# Altium PCB PCB2(binary).PcbDoc (part 1 of 2)
Units mm, origin at the board's own origin, x right, y up, seen from the top; angles counter-clockwise.
Board outline 121.9 x 82.3 mm, 2 copper layers (Top Layer, Bottom Layer); 260 components, 214 nets, 701 pads, 54 vias.
Unrouted connection lines stored in the file: 53.
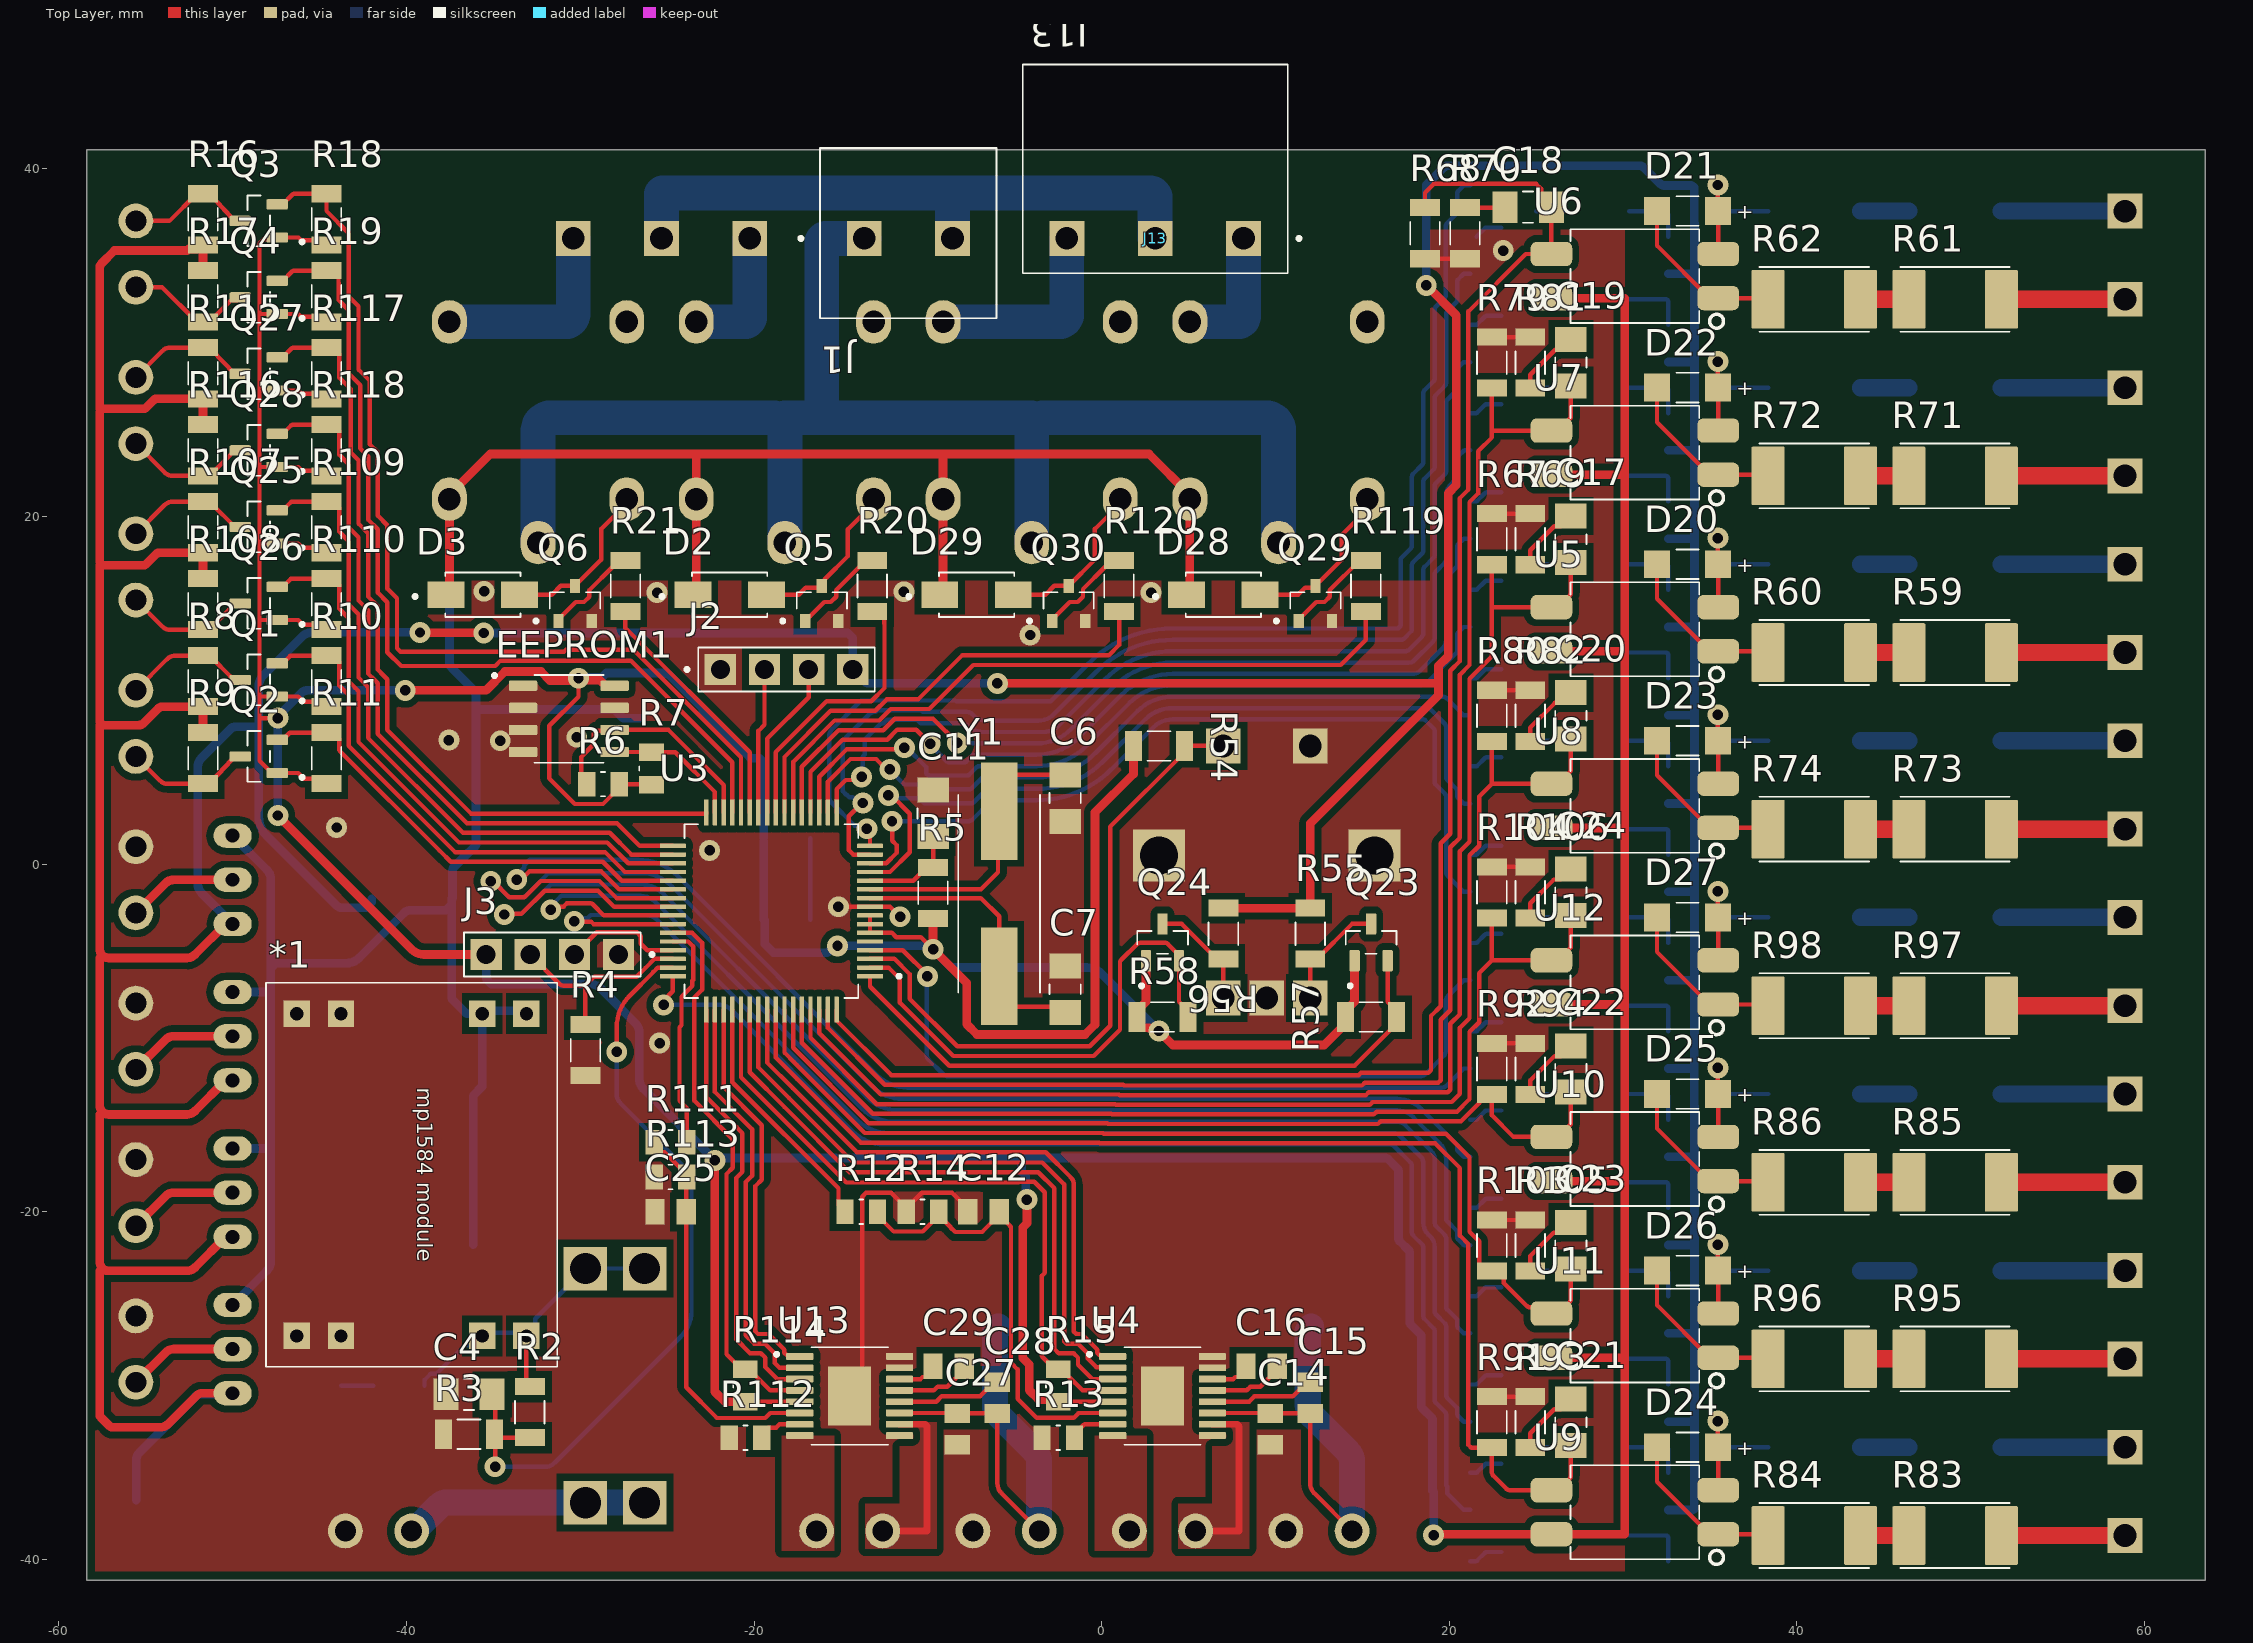
[diagram p0: Top Layer view]
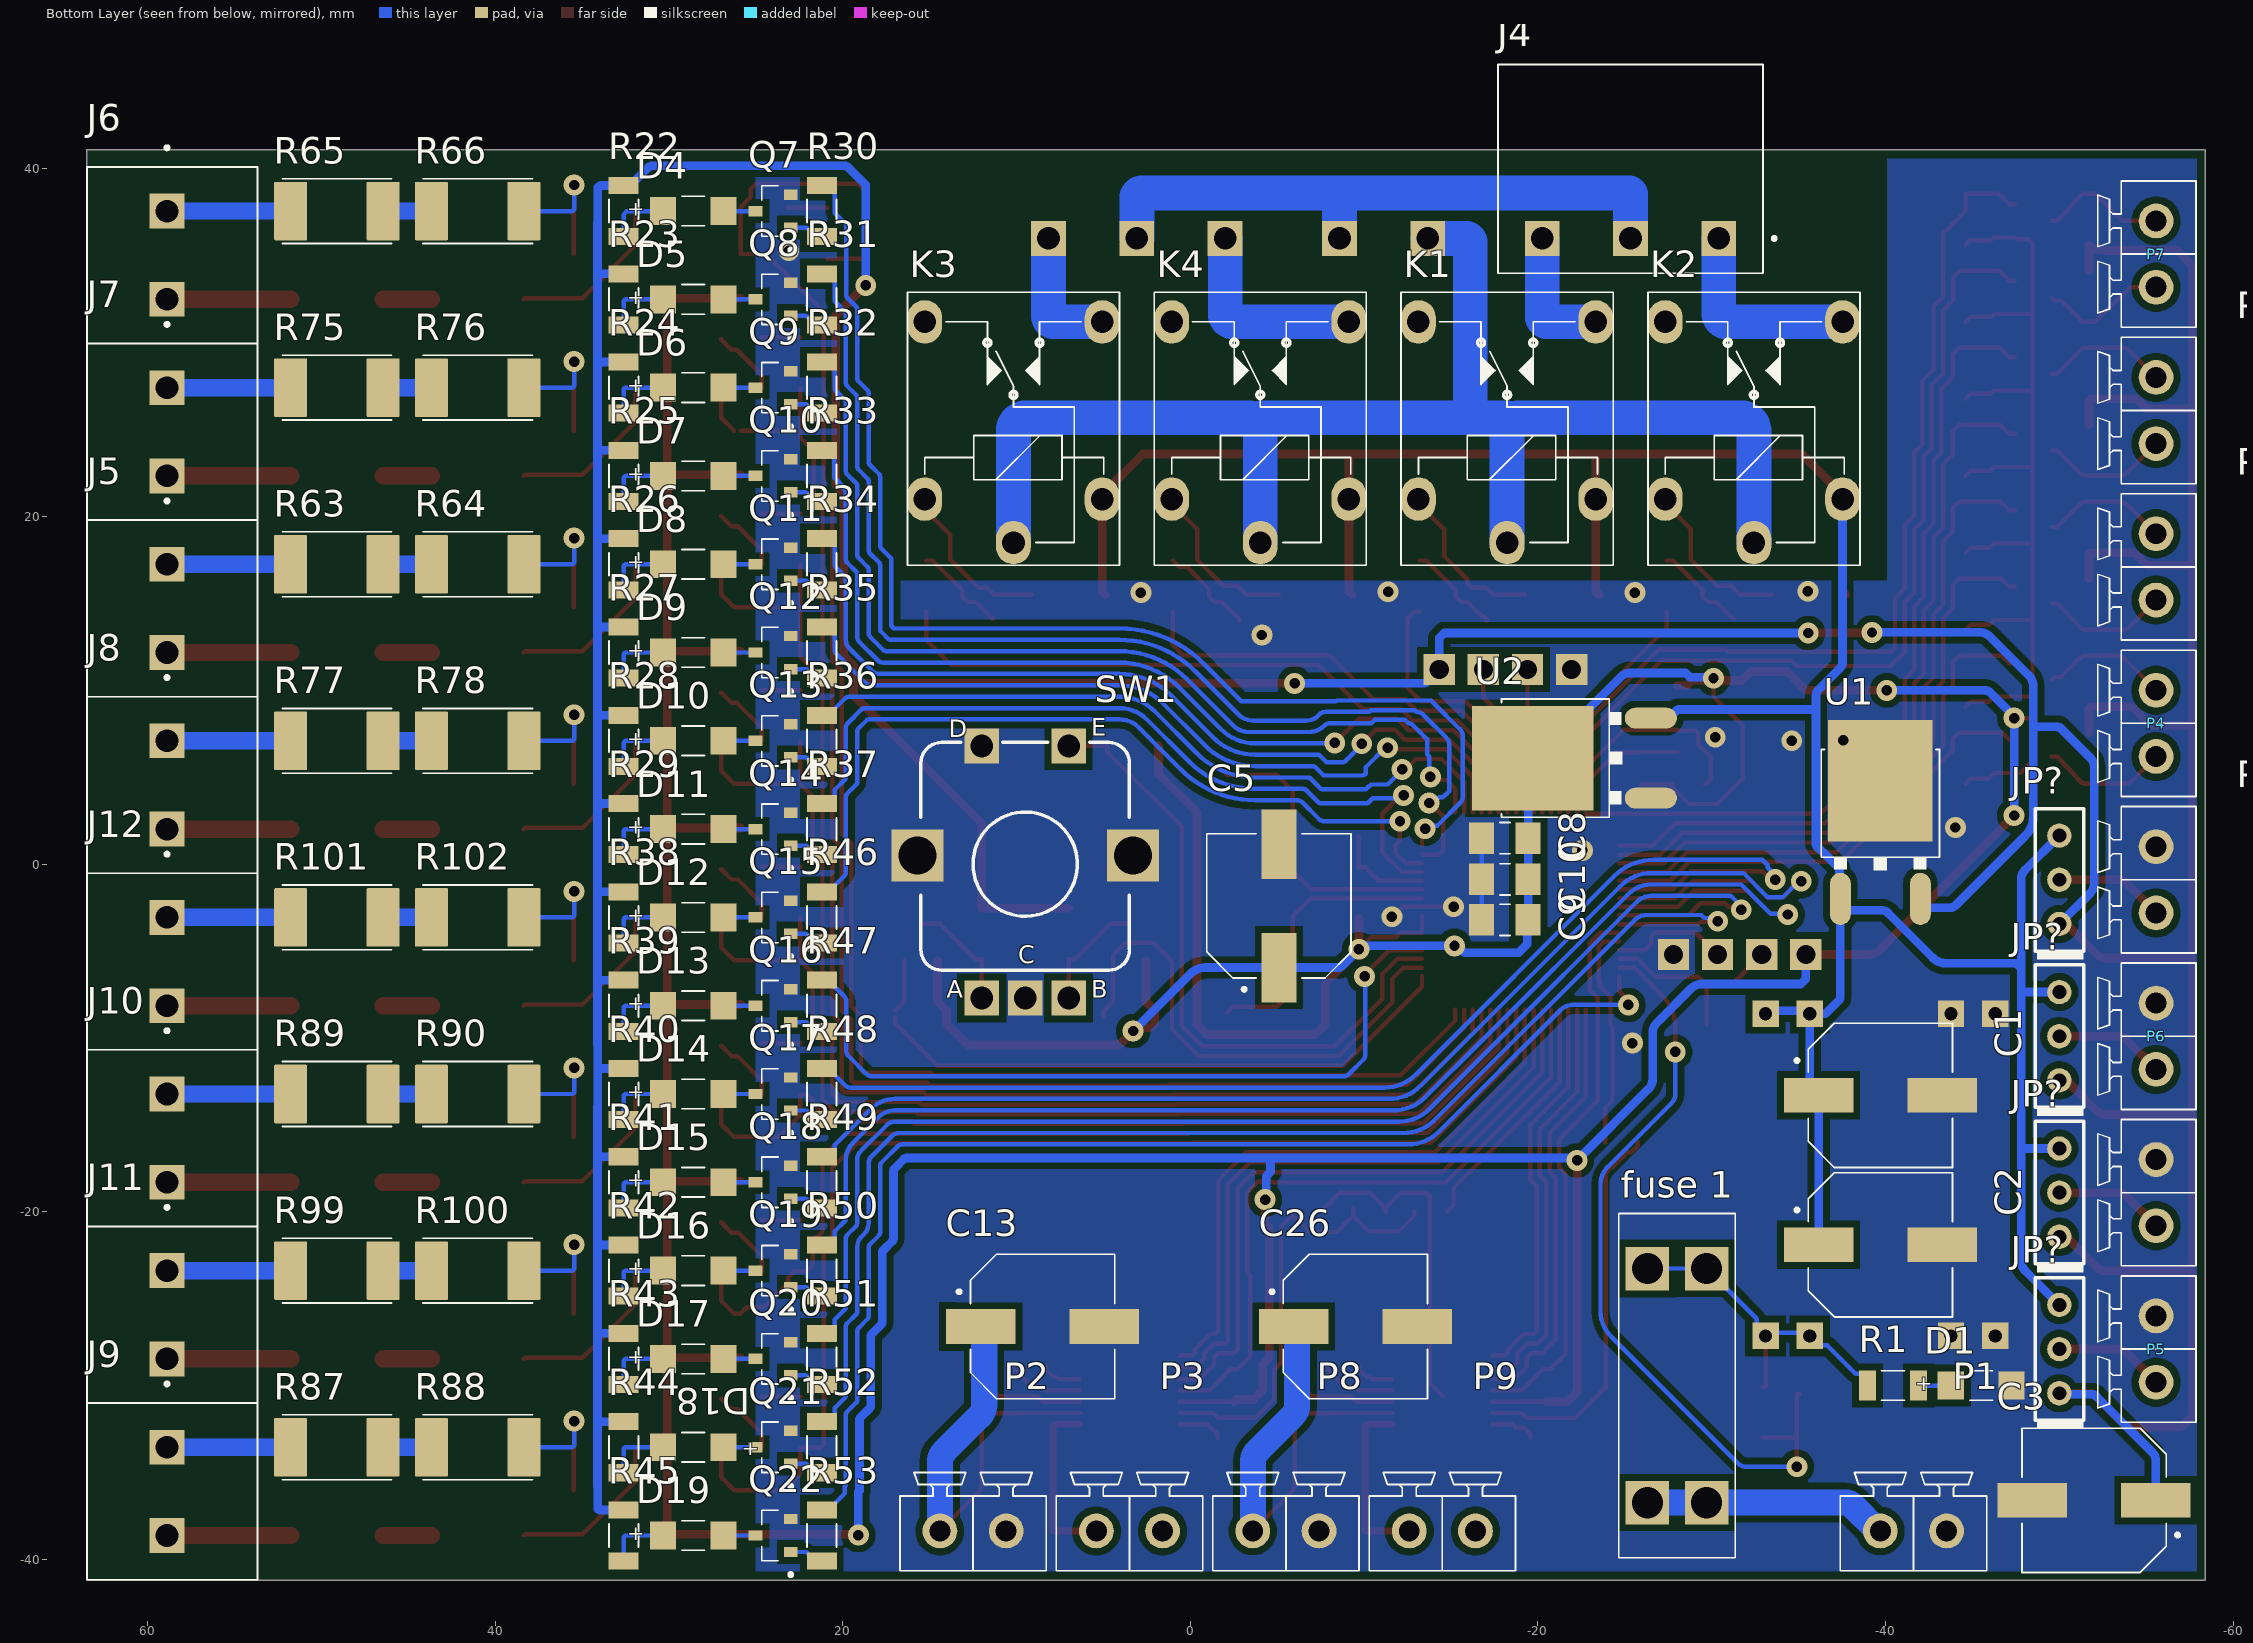
[diagram p1: Bottom Layer view, seen from below]

## Layer stack, top to bottom
Top Solder: solder mask 0.0102, Solder Resist, Dk 3.5
Top Layer: signal copper 0.0356
Dielectric 1: dielectric 0.32, FR-4, Dk 4.8
Bottom Layer: signal copper 0.0356
Bottom Solder: solder mask 0.0102, Solder Resist, Dk 3.5

## Board outline
-58.4,-41.2 -58.4,41.1 63.5,41.1 63.5,-41.2

## Design rules (kind name [scope] priority, off if disabled: settings)
AcuteAngle [All] p1: minimum=6.00000000000000E+0001 checktracksonly=FALSE
BoardOutlineClearance [All] p1: gap=0.5 ignorepadtopadclearanceinfootprint=FALSE
Clearance [All] p1: gap=0.254 ignorepadtopadclearanceinfootprint=FALSE except(0.4: Arc-Poly Track-Poly SMDPad-Poly THPad-Poly Via-Poly Fill-Poly Poly-Poly Poly-Region Poly-Text Poly-Hole)
HoleSize [All] p1: absolutevalues=TRUE maxlimit=2.54 minlimit=0.5 maxpercent=80.000 minpercent=20.000
HoleToHoleClearance [All] p1: gap=0.8 allowstackedmicrovias=TRUE
MinimumAnnularRing [All] p1: minimumring=0.254
PlaneConnect [All] p1: planeconnectstyle=Direct reliefexpansion=0.508 reliefentries=4 reliefconductorwidth=0.254 reliefairgap=0.254
PolygonConnect [All] p1: connectstyle=Direct reliefconductorwidth=0.254 reliefentries=4 polygonreliefangle="90 Angle" airgapwidth=0.254
RoutingVias [All] p1: holewidth=0.6 width=1.2 viastyle="Through Hole" minholewidth=0.6 minwidth=1.2 maxholewidth=0.6 maxwidth=1.2
SolderMaskExpansion [All] p1: expansion=0.102 istentingtop=FALSE
SupplyNets "Schematic Supply Nets_2" [InNet('3.3v')] p1: voltage=0.000
SupplyNets "Schematic Supply Nets" [InNet('GND')] p2: voltage=0.000
Width [All] p1: maxlimit=5 minlimit=0.254 preferedwidth=0.254
27 further rules are at their usual default settings.

## Classes and differential pairs
component class "receiver 2": C21 C22 C23 C24 D24 D25 D26 D27 J9 J10 J11 J12 R83 R84 R85 R86 R87 R88 R89 R90 R91 R92 R93 R94 R95 R96 R97 R98 R99 R100 R101 R102 R103 R104 R105 R106 U9 U10 U11 U12
component class "receiver 1": C17 C18 C19 C20 D20 D21 D22 D23 J5 J6 J7 J8 R59 R60 R61 R62 R63 R64 R65 R66 R67 R68 R69 R70 R71 R72 R73 R74 R75 R76 R77 R78 R79 R80 R81 R82 U5 U6 U7 U8
component class "motor driver 2": D28 D29 J13 JP? K3 K4 P12 P13 Q27 Q28 Q29 Q30 R115 R116 R117 R118 R119 R120
component class Power: *1 C1 C2 C3 C4 C5 D1 "fuse 1" J1 P1 R1 R2 R3 U1 U2
component class "motor driver 1": D2 D3 J4 JP? K1 K2 P6 P7 Q3 Q4 Q5 Q6 R16 R17 R18 R19 R20 R21
component class MCU: C6 C7 C8 C9 C10 C11 EEPROM1 fram? J2 J3 R4 R5 R6 R7 S? U3 Y1 Y?
component class "jack driver 2": C25 C26 C27 C28 C29 JP? P8 P9 P10 P11 Q25 Q26 R107 R108 R109 R110 R111 R112 R113 R114 U13
component class "jack driver 1": C12 C13 C14 C15 C16 JP? P2 P3 P4 P5 Q1 Q2 R8 R9 R10 R11 R12 R13 R14 R15 U4
component class interface: D4 D5 D6 D7 D8 D9 D10 D11 D12 D13 D14 D15 D16 D17 D18 D19 Q7 Q8 Q9 Q10 Q11 Q12 Q13 Q14 Q15 Q16 Q17 Q18 Q19 Q20 Q21 Q22 Q23 Q24 R22 R23 R24 R25 R26 R27 R28 R29 R30 R31 R32 R33 R34 R35 R36 R37 R38 R39 R40 R41 R42 R43 R44 R45 R46 R47 R48 R49 R50 R51 R52 R53 R54 R55 R56 R57 R58 SW1

## Components (designator, comment, footprint, x,y, rotation, side; value= is the part's Value field where it differs from the comment)
*1 "mp 1584 12v" PCBComponent_1#1 -39.7,-17.873 r270 top
C1 "470uF-16v-polymer" CAP_EEEFN1H101L -39.7,-13.3 r180 bottom
C2 "470uF-16v-polymer" CAP_EEEFN1H101L -39.7,-21.9 r180 bottom
C3 "470uF-16v-polymer" CAP_EEEFN1H101L -52,-36.6 r0 bottom
C4 "1nF-1206" CAPC3216X180N -36.4,-30.5 r0 top
C5 "470uF-6.3v-polymer" CAP_EEEFN1H101L -5.1,-2.4 r90 bottom
C6 "22pf-1206" CAPC3216X180N -2.1,3.8 r90 top locked
C7 "22pf-1206" CAPC3216X180N -2.1,-7.2 r270 top locked
C8 "1uf-1206" CAPC3216X180N -18.1,1.5 r180 bottom
C9 "1uf-1206" CAPC3216X180N -18.1,-3.2 r180 bottom
C10 "1uf-1206" CAPC3216X180N -18.1,-0.875 r180 bottom
C11 "1uf-1206" CAPC3216X180N -9.7,2.921 r270 top
C12 "22nf -0805" CAPC2012X145N -6.8,-20 r0 top locked
C13 "100uF-50v-polymer" CAP_EEEFN1H101L 8.5,-26.6 r180 bottom
C14 "100nf -0805" CAPC2012X145N 9.7,-32.5 r90 top locked
C15 "100nf -0805" CAPC2012X145N 12,-30.7 r270 top locked
C16 "22nf -0805" CAPC2012X145N 9.2,-28.9 r0 top locked
C17 "1uf-1206" CAPC3216X180N 26.992,18.695 r270 top locked
C18 "1uf-1206" CAPC3216X180N 24.536,37.8 r0 top locked
C19 "1uf-1206" CAPC3216X180N 26.992,28.855 r270 top locked
C20 "1uf-1206" CAPC3216X180N 26.992,8.535 r270 top locked
C21 "1uf-1206" CAPC3216X180N 26.992,-32.105 r270 top locked
C22 "1uf-1206" CAPC3216X180N 26.992,-11.785 r270 top locked
C23 "1uf-1206" CAPC3216X180N 26.992,-21.945 r270 top locked
C24 "1uf-1206" CAPC3216X180N 26.992,-1.625 r270 top locked
C25 "22nf -0805" CAPC2012X145N -24.8,-20 r0 top locked
C26 "100uF-50v-polymer" CAP_EEEFN1H101L -9.5,-26.6 r180 bottom
C27 "100nf -0805" CAPC2012X145N -8.3,-32.5 r90 top locked
C28 "100nf -0805" CAPC2012X145N -6,-30.7 r270 top locked
C29 "22nf -0805" CAPC2012X145N -8.8,-28.9 r0 top locked
D1 "led-red-1206" "WL-SMRW_1206 dome_normal use" -45.5,-30 r0 bottom
D2 "1N4007-SMA" DIOM4325X250N -21.4,15.5 r0 top locked
D3 "1N4007-SMA" DIOM4325X250N -35.6,15.5 r0 top locked
D4 "led-red-1206" "WL-SMRW_1206 dome_normal use" 28.6,37.575 r0 bottom locked
D5 "led-red-1206" "WL-SMRW_1206 dome_normal use" 28.6,32.495 r0 bottom locked
D6 "led-red-1206" "WL-SMRW_1206 dome_normal use" 28.6,27.415 r0 bottom locked
D7 "led-red-1206" "WL-SMRW_1206 dome_normal use" 28.6,22.335 r0 bottom locked
D8 "led-red-1206" "WL-SMRW_1206 dome_normal use" 28.6,17.255 r0 bottom locked
D9 "led-red-1206" "WL-SMRW_1206 dome_normal use" 28.6,12.175 r0 bottom locked
D10 "led-red-1206" "WL-SMRW_1206 dome_normal use" 28.6,7.095 r0 bottom locked
D11 "led-red-1206" "WL-SMRW_1206 dome_normal use" 28.6,2.015 r0 bottom locked
D12 "led-red-1206" "WL-SMRW_1206 dome_normal use" 28.6,-3.065 r0 bottom locked
D13 "led-red-1206" "WL-SMRW_1206 dome_normal use" 28.6,-8.145 r0 bottom locked
D14 "led-red-1206" "WL-SMRW_1206 dome_normal use" 28.6,-13.225 r0 bottom locked
D15 "led-red-1206" "WL-SMRW_1206 dome_normal use" 28.6,-18.305 r0 bottom locked
D16 "led-red-1206" "WL-SMRW_1206 dome_normal use" 28.6,-23.385 r0 bottom locked
D17 "led-red-1206" "WL-SMRW_1206 dome_normal use" 28.6,-28.465 r0 bottom locked
D18 "led-red-1206" "WL-SMRW_1206 dome_normal use" 28.6,-33.545 r0 bottom locked
D19 "led-red-1206" "WL-SMRW_1206 dome_normal use" 28.6,-38.625 r0 bottom locked
D20 "led-red-1206" "WL-SMRW_1206 dome_normal use" 33.7,17.255 r0 top locked
D21 "led-red-1206" "WL-SMRW_1206 dome_normal use" 33.7,37.575 r0 top locked
D22 "led-red-1206" "WL-SMRW_1206 dome_normal use" 33.7,27.415 r0 top locked
D23 "led-red-1206" "WL-SMRW_1206 dome_normal use" 33.7,7.095 r0 top locked
D24 "led-red-1206" "WL-SMRW_1206 dome_normal use" 33.7,-33.545 r0 top locked
D25 "led-red-1206" "WL-SMRW_1206 dome_normal use" 33.7,-13.225 r0 top locked
D26 "led-red-1206" "WL-SMRW_1206 dome_normal use" 33.7,-23.385 r0 top locked
D27 "led-red-1206" "WL-SMRW_1206 dome_normal use" 33.7,-3.065 r0 top locked
D28 "1N4007-SMA" DIOM4325X250N 7,15.5 r0 top locked
D29 "1N4007-SMA" DIOM4325X250N -7.2,15.5 r0 top locked
EEPROM1 "Component_1" SOIC127P602X172-8N -30.658,8.357 r0 top
"fuse 1" "car fuse" PCBComponent_1#2 -28,-30 r90 bottom
J1 "phoenix-5.08mm-2pos" PHOENIX_1715721 -16.205,31.4 r0 top locked
J2 "MTSW-104-24-G-S-230" SAMTEC_MTSW-104-24-G-S-230 -18.13,11.2 r180 top
J3 "MTSW-104-24-G-S-230" SAMTEC_MTSW-104-24-G-S-230 -31.604,-5.2 r0 top
J4 "phoenix-5.08mm-3pos" PHOENIX_1759020 -32.945,46 r0 bottom locked
J5 "phoenix-5.08mm-2pos" PHOENIX_1715721 63.475,19.795 r270 bottom locked
J6 "phoenix-5.08mm-2pos" PHOENIX_1715721 63.475,40.115 r270 bottom locked
J7 "phoenix-5.08mm-2pos" PHOENIX_1715721 63.475,29.955 r270 bottom locked
J8 "phoenix-5.08mm-2pos" PHOENIX_1715721 63.475,9.635 r270 bottom locked
J9 "phoenix-5.08mm-2pos" PHOENIX_1715721 63.475,-31.005 r270 bottom locked
J10 "phoenix-5.08mm-2pos" PHOENIX_1715721 63.475,-10.685 r270 bottom locked
J11 "phoenix-5.08mm-2pos" PHOENIX_1715721 63.475,-20.845 r270 bottom locked
J12 "phoenix-5.08mm-2pos" PHOENIX_1715721 63.475,-0.525 r270 bottom locked
J13 "phoenix-5.08mm-3pos" PHOENIX_1759020 10.7,46 r180 top
JP? "HDRF3" HDRLP_F_1X3 -50,-18.9 r90 bottom
JP? "HDRF3" HDRLP_F_1X3 -50,-27.9 r90 bottom
JP? "HDRF3" HDRLP_F_1X3 -50,-0.9 r90 bottom
JP? "HDRF3" HDRLP_F_1X3 -50,-9.9 r90 bottom
K1 "RELAY_SPDT" REL_SPDT_5_1512 -18.225,21 r0 bottom
K2 "RELAY_SPDT" REL_SPDT_5_1512 -32.425,21 r0 bottom
K3 "RELAY_SPDT" REL_SPDT_5_1512 10.175,21 r0 bottom
K4 "RELAY_SPDT" REL_SPDT_5_1512 -4.025,21 r0 bottom
P1 "phoenix-3.81mm-2pos" PHOENIX_1803578 -41.605,-39 r0 bottom
P2 "phoenix-3.81mm-2pos" PHOENIX_1803578 12.5,-39 r0 bottom
P3 "phoenix-3.81mm-2pos" PHOENIX_1803578 3.5,-39 r0 bottom
P4 "phoenix-3.81mm-2pos" PHOENIX_1803578 -56.2,8.1 r270 bottom
P5 "phoenix-3.81mm-2pos" PHOENIX_1803578 -56.2,-27.9 r270 bottom
P6 "phoenix-3.81mm-2pos" PHOENIX_1803578 -56.2,-9.9 r270 bottom
P7 "phoenix-3.81mm-2pos" PHOENIX_1803578 -56.2,35.1 r270 bottom
P8 "phoenix-3.81mm-2pos" PHOENIX_1803578 -5.5,-39 r0 bottom
P9 "phoenix-3.81mm-2pos" PHOENIX_1803578 -14.5,-39 r0 bottom
P10 "phoenix-3.81mm-2pos" PHOENIX_1803578 -56.2,17.1 r270 bottom
P11 "phoenix-3.81mm-2pos" PHOENIX_1803578 -56.2,-18.9 r270 bottom
P12 "phoenix-3.81mm-2pos" PHOENIX_1803578 -56.2,-0.9 r270 bottom
P13 "phoenix-3.81mm-2pos" PHOENIX_1803578 -56.2,26.1 r270 bottom
Q1 "2N7002" SOT95P240X111-3N -48.5,10.596 r180 top
Q2 "2N7002" SOT95P240X111-3N -48.5,6.195 r180 top
Q3 "2N7002" SOT95P240X111-3N -48.5,37.005 r180 top
Q4 "2N7002" SOT95P240X111-3N -48.5,32.604 r180 top
Q5 "SS8050" TRANS_SS8050-G -16.1,15 r90 top locked
Q6 "SS8050" TRANS_SS8050-G -30.3,15 r90 top locked
Q7 "SS8050" TRANS_SS8050-G 24,37.575 r0 bottom locked
Q8 "SS8050" TRANS_SS8050-G 24,32.495 r0 bottom locked
Q9 "SS8050" TRANS_SS8050-G 24,27.415 r0 bottom locked
Q10 "SS8050" TRANS_SS8050-G 24,22.335 r0 bottom locked
Q11 "SS8050" TRANS_SS8050-G 24,17.255 r0 bottom locked
Q12 "SS8050" TRANS_SS8050-G 24,12.175 r0 bottom locked
Q13 "SS8050" TRANS_SS8050-G 24,7.095 r0 bottom locked
Q14 "SS8050" TRANS_SS8050-G 24,2.015 r0 bottom locked
Q15 "SS8050" TRANS_SS8050-G 24,-3.065 r0 bottom locked
Q16 "SS8050" TRANS_SS8050-G 24,-8.145 r0 bottom locked
Q17 "SS8050" TRANS_SS8050-G 24,-13.225 r0 bottom locked
Q18 "SS8050" TRANS_SS8050-G 24,-18.305 r0 bottom locked
Q19 "SS8050" TRANS_SS8050-G 24,-23.385 r0 bottom locked
Q20 "SS8050" TRANS_SS8050-G 24,-28.465 r0 bottom locked
Q21 "SS8050" TRANS_SS8050-G 24,-33.545 r0 bottom locked
Q22 "SS8050" TRANS_SS8050-G 24,-38.625 r0 bottom locked
Q23 "2N7002" SOT95P240X111-3N 15.5,-4.5 r90 top
Q24 "2N7002" SOT95P240X111-3N 3.5,-4.5 r90 top
Q25 "2N7002" SOT95P240X111-3N -48.5,19.399 r180 top
Q26 "2N7002" SOT95P240X111-3N -48.5,14.998 r180 top
Q27 "2N7002" SOT95P240X111-3N -48.5,28.202 r180 top
Q28 "2N7002" SOT95P240X111-3N -48.5,23.801 r180 top
Q29 "SS8050" TRANS_SS8050-G 12.3,15 r90 top locked
Q30 "SS8050" TRANS_SS8050-G -1.9,15 r90 top locked
R1 "4.7k-1206" RESC3015X65N -40.43,-30 r0 bottom
R2 "220k-1206" RESC3015X65N -32.9,-31.53 r90 top
R3 "22k-1206" RESC3015X65N -36.4,-32.8 r0 top
R4 "4.7k-1206" RESC3015X65N -29.7,-10.7 r270 top
R5 "4.7k-1206" RESC3015X65N -9.7,-1.652 r270 top
R6 "4.7k -0805" RESC2012X65N -28.7,4.6 r0 top
R7 "4.7k -0805" RESC2012X65N -25.9,5.5 r270 top
R8 "4.7k-1206" RESC3015X65N -51.7,10.529 r270 top
R9 "4.7k-1206" RESC3015X65N -51.7,6.1 r90 top
R10 "4.7k-1206" RESC3015X65N -44.6,10.529 r270 top
R11 "4.7k-1206" RESC3015X65N -44.6,6.1 r270 top
R12 "0 ohm-0805" RESC2012X65N -13.835,-20 r180 top locked
R13 "0 ohm-0805" RESC2012X65N -2.5,-33 r180 top locked
R14 "IPROPI1" RESC2012X65N -10.3,-20 r0 top locked
R15 "4.7k -0805" RESC2012X65N -2.5,-30 r270 top locked
R16 "4.7k-1206" RESC3015X65N -51.7,37.1 r270 top
R17 "4.7k-1206" RESC3015X65N -51.7,32.671 r90 top
R18 "4.7k-1206" RESC3015X65N -44.6,37.1 r270 top
R19 "4.7k-1206" RESC3015X65N -44.6,32.671 r270 top
R20 "4.7k-1206" RESC3015X65N -13.2,16 r270 top locked
R21 "4.7k-1206" RESC3015X65N -27.4,16 r270 top locked
R22 "300 ohm-1206" RESC3015X65N 32.6,37.575 r90 bottom locked
R23 "300 ohm-1206" RESC3015X65N 32.6,32.495 r90 bottom locked
R24 "300 ohm-1206" RESC3015X65N 32.6,27.415 r90 bottom locked
R25 "300 ohm-1206" RESC3015X65N 32.6,22.335 r90 bottom locked
R26 "300 ohm-1206" RESC3015X65N 32.6,17.255 r90 bottom locked
R27 "300 ohm-1206" RESC3015X65N 32.6,12.175 r90 bottom locked
R28 "300 ohm-1206" RESC3015X65N 32.6,7.095 r90 bottom locked
R29 "300 ohm-1206" RESC3015X65N 32.6,2.015 r90 bottom locked
R30 "4.7k-1206" RESC3015X65N 21.2,37.575 r90 bottom locked
R31 "4.7k-1206" RESC3015X65N 21.2,32.495 r90 bottom locked
R32 "4.7k-1206" RESC3015X65N 21.2,27.415 r90 bottom locked
R33 "4.7k-1206" RESC3015X65N 21.2,22.335 r90 bottom locked
R34 "4.7k-1206" RESC3015X65N 21.2,17.255 r90 bottom locked
R35 "4.7k-1206" RESC3015X65N 21.2,12.175 r90 bottom locked
R36 "4.7k-1206" RESC3015X65N 21.2,7.095 r90 bottom locked
R37 "4.7k-1206" RESC3015X65N 21.2,2.015 r90 bottom locked
R38 "300 ohm-1206" RESC3015X65N 32.6,-3.065 r90 bottom locked
R39 "300 ohm-1206" RESC3015X65N 32.6,-8.145 r90 bottom locked
R40 "300 ohm-1206" RESC3015X65N 32.6,-13.225 r90 bottom locked
R41 "300 ohm-1206" RESC3015X65N 32.6,-18.305 r90 bottom locked
R42 "300 ohm-1206" RESC3015X65N 32.6,-23.385 r90 bottom locked
R43 "300 ohm-1206" RESC3015X65N 32.6,-28.465 r90 bottom locked
R44 "300 ohm-1206" RESC3015X65N 32.6,-33.545 r90 bottom locked
R45 "300 ohm-1206" RESC3015X65N 32.6,-38.625 r90 bottom locked
R46 "4.7k-1206" RESC3015X65N 21.2,-3.065 r90 bottom locked
R47 "4.7k-1206" RESC3015X65N 21.2,-8.145 r90 bottom locked
R48 "4.7k-1206" RESC3015X65N 21.2,-13.225 r90 bottom locked
R49 "4.7k-1206" RESC3015X65N 21.2,-18.305 r90 bottom locked
R50 "4.7k-1206" RESC3015X65N 21.2,-23.385 r90 bottom locked
R51 "4.7k-1206" RESC3015X65N 21.2,-28.465 r90 bottom locked
R52 "4.7k-1206" RESC3015X65N 21.2,-33.545 r90 bottom locked
R53 "4.7k-1206" RESC3015X65N 21.2,-38.625 r90 bottom locked
R54 "4.7k-1206" RESC3015X65N 3.3,6.8 r180 top locked
R55 "4.7k-1206" RESC3015X65N 12,-4 r90 top locked
R56 "4.7k-1206" RESC3015X65N 7,-4 r90 top locked
R57 "4.7k-1206" RESC3015X65N 15.5,-8.8 r0 top
R58 "4.7k-1206" RESC3015X65N 3.5,-8.8 r180 top
R59 "10k-2512" RESC6331X70N 49.1,12.175 r180 top locked
R60 "10k-2512" RESC6331X70N 41,12.175 r180 top locked
R61 "10k-2512" RESC6331X70N 49.1,32.495 r180 top locked
R62 "10k-2512" RESC6331X70N 41,32.495 r180 top locked
R63 "10k-2512" RESC6331X70N 49.1,17.255 r180 bottom locked
R64 "10k-2512" RESC6331X70N 41,17.255 r180 bottom locked
R65 "10k-2512" RESC6331X70N 49.1,37.575 r180 bottom locked
R66 "10k-2512" RESC6331X70N 41,37.575 r180 bottom locked
R67 "300 ohm-1206" RESC3015X65N 22.45,18.695 r270 top locked
R68 "300 ohm-1206" RESC3015X65N 18.6,36.3 r90 top locked
R69 "4.7k-1206" RESC3015X65N 24.656,18.695 r270 top locked
R70 "4.7k-1206" RESC3015X65N 20.9,36.3 r90 top locked
R71 "10k-2512" RESC6331X70N 49.1,22.335 r180 top locked
R72 "10k-2512" RESC6331X70N 41,22.335 r180 top locked
R73 "10k-2512" RESC6331X70N 49.1,2.015 r180 top locked
R74 "10k-2512" RESC6331X70N 41,2.015 r180 top locked
R75 "10k-2512" RESC6331X70N 49.1,27.415 r180 bottom locked
R76 "10k-2512" RESC6331X70N 41,27.415 r180 bottom locked
R77 "10k-2512" RESC6331X70N 49.1,7.095 r180 bottom locked
R78 "10k-2512" RESC6331X70N 41,7.095 r180 bottom locked
R79 "300 ohm-1206" RESC3015X65N 22.45,28.855 r270 top locked
R80 "300 ohm-1206" RESC3015X65N 22.45,8.535 r270 top locked
R81 "4.7k-1206" RESC3015X65N 24.656,28.855 r270 top locked
R82 "4.7k-1206" RESC3015X65N 24.656,8.535 r270 top locked
R83 "10k-2512" RESC6331X70N 49.1,-38.625 r180 top locked
R84 "10k-2512" RESC6331X70N 41,-38.625 r180 top locked
R85 "10k-2512" RESC6331X70N 49.1,-18.305 r180 top locked
R86 "10k-2512" RESC6331X70N 41,-18.305 r180 top locked
R87 "10k-2512" RESC6331X70N 49.1,-33.545 r180 bottom locked
R88 "10k-2512" RESC6331X70N 41,-33.545 r180 bottom locked
R89 "10k-2512" RESC6331X70N 49.1,-13.225 r180 bottom locked
R90 "10k-2512" RESC6331X70N 41,-13.225 r180 bottom locked
R91 "300 ohm-1206" RESC3015X65N 22.45,-32.105 r270 top locked
R92 "300 ohm-1206" RESC3015X65N 22.45,-11.785 r270 top locked
R93 "4.7k-1206" RESC3015X65N 24.656,-32.105 r270 top locked
R94 "4.7k-1206" RESC3015X65N 24.656,-11.785 r270 top locked
R95 "10k-2512" RESC6331X70N 49.1,-28.465 r180 top locked
R96 "10k-2512" RESC6331X70N 41,-28.465 r180 top locked
R97 "10k-2512" RESC6331X70N 49.1,-8.145 r180 top locked
R98 "10k-2512" RESC6331X70N 41,-8.145 r180 top locked
R99 "10k-2512" RESC6331X70N 49.1,-23.385 r180 bottom locked
R100 "10k-2512" RESC6331X70N 41,-23.385 r180 bottom locked
R101 "10k-2512" RESC6331X70N 49.1,-3.065 r180 bottom locked
R102 "10k-2512" RESC6331X70N 41,-3.065 r180 bottom locked
R103 "300 ohm-1206" RESC3015X65N 22.45,-21.945 r270 top locked
R104 "300 ohm-1206" RESC3015X65N 22.45,-1.625 r270 top locked
R105 "4.7k-1206" RESC3015X65N 24.656,-21.945 r270 top locked
R106 "4.7k-1206" RESC3015X65N 24.656,-1.625 r270 top locked
R107 "4.7k-1206" RESC3015X65N -51.7,19.386 r270 top
R108 "4.7k-1206" RESC3015X65N -51.7,14.957 r90 top
R109 "4.7k-1206" RESC3015X65N -44.6,19.386 r270 top
R110 "4.7k-1206" RESC3015X65N -44.6,14.957 r270 top
R111 "0 ohm-0805" RESC2012X65N -24.8,-16 r0 top
R112 "0 ohm-0805" RESC2012X65N -20.5,-33 r180 top locked
R113 "IPROPI1" RESC2012X65N -24.8,-18 r0 top locked
R114 "4.7k -0805" RESC2012X65N -20.5,-30 r270 top locked
R115 "4.7k-1206" RESC3015X65N -51.7,28.243 r270 top
R116 "4.7k-1206" RESC3015X65N -51.7,23.814 r90 top
R117 "4.7k-1206" RESC3015X65N -44.6,28.243 r270 top
R118 "4.7k-1206" RESC3015X65N -44.6,23.814 r270 top
R119 "4.7k-1206" RESC3015X65N 15.2,16 r270 top locked
R120 "4.7k-1206" RESC3015X65N 1,16 r270 top locked
SW1 "RotaryEncoderSwitch" SWROT_11MM 9.5,0 r180 bottom
U1 "LF50" DPAK_3 -39.7,-2 r180 bottom
U2 "AMS1117" DPAK_3 -26.5,6.1 r90 bottom
U3 "STM32G070RBT6" QFP50P1200X1200X160-64N -19,-2.7 r180 top locked
U4 "DRV8874PWPR" SOP65P640X120-17N 3.5,-30.6 r0 top locked
U5 "EL817" DIP_4SMD 30.675,13.515 r180 top locked
U6 "EL817" DIP_4SMD 30.675,33.835 r180 top locked
U7 "EL817" DIP_4SMD 30.675,23.675 r180 top locked
U8 "EL817" DIP_4SMD 30.675,3.355 r180 top locked
U9 "EL817" DIP_4SMD 30.675,-37.285 r180 top locked
U10 "EL817" DIP_4SMD 30.675,-16.965 r180 top locked
U11 "EL817" DIP_4SMD 30.675,-27.125 r180 top locked
U12 "EL817" DIP_4SMD 30.675,-6.805 r180 top locked
U13 "DRV8874PWPR" SOP65P640X120-17N -14.5,-30.6 r0 top locked
Y1 "8MHZ" XTAL_ABLS2-12.000MHZ-D4Y-T -5.9,-1.7 r90 top locked

## Footprints (in the part's own frame and the unit in brackets; to place one, negate y for a bottom-side part, rotate by r counter-clockwise, add the part's x,y. Pads: shape width x height; smd on the part's side, far side on the other; paste and mask are expansions set on the pad)
CAP_EEEFN1H101L [mm]
  rect 4x2 smd: 1(-3.55,0) 2(3.55,0)
  silkscreen extent -4.9,-4.15 4.15,4.15, body extent -4.85,-4.15 4.85,4.15, height 10.2
CAPC2012X145N [mm]
  rect 1.11x1.47 smd: 1(-0.9,0) 2(0.9,0)
  body extent -1,-0.63 1,0.63, height 1.45
CAPC3216X180N [mm]
  rect 1.44x1.82 smd: 1(-1.336,0) 2(1.336,0)
  silkscreen extent -0.29,-0.9 0.29,0.9, body extent -1.6,-0.8 1.6,0.8, height 1.8
DIOM4325X250N [mm]
  rect 2.12x1.5 smd: A(2.115,0) C(-2.115,0)
  silkscreen extent -4,-1.28 2.16,1.28, body extent -2.57,-1.28 2.57,1.28, height 2.5
DIP_4SMD [mm] "DIP4, pitch 2.54mm, 300mil Width SMD"
  rrect50% 2.4x1.4 smd: 1(-4.8,1.27) 2(-4.8,-1.27) 3(4.8,-1.27) 4(4.8,1.27)
  silkscreen extent -5.1,-2.7 3.7,3, body extent -5.23,-2.55 5.23,2.55, height 4.6
DPAK_3 [mm] "D-PAK (TO-252), 3-Pads, Body 6.2x6.7mm"
  oval 1.2x3 smd: 1(-2.3,0) 3(2.3,0)
  rect 6x7 smd paste-5: 4(0,6.8)
  silkscreen extent -3.4,1.63 3.4,8.6, body extent -3.37,-0.5 3.37,9.6, height 2.37
HDRLP_F_1X3 [mm] "Connector Socket, Single-row 1-position, 0.100\" pitch"
  round 1.4 / inner round 1.4 / far side oval 1.4x2.2 hole 0.8: 1(-2.54,0) 2(0,0) 3(2.54,0)
  silkscreen extent -4.6,-1.4 4.1,1.4, body extent -4,-1.27 4,1.27, height 4.19
PCBComponent_1#1 [mil]
  rect 60x60 hole 30: 1(365,160) 1(365,260) 2(365,-260) 2(365,-160) 3(-365,-260) 3(-365,-160) 4(-365,160) 4(-365,260)
  silkscreen extent -435,-330 435,330
PCBComponent_1#2 [mil]
  rect 98.43x98.43 hole 70.87: 1(-265.16,-66.93) 1(-265.16,66.93) 2(265.16,-66.93) 2(265.16,66.93)
  silkscreen extent -390,-132 390,132
PHOENIX_1715721 [mm]
  rect 2x2 hole 1.3 mask-2539.97: 1(2.54,4.6) 2(7.62,4.6)
  silkscreen extent -1.2,0 10.16,9.8
PHOENIX_1759020 [mm]
  rect 2x2 hole 1.3 mask-2539.97: 01(2.54,10) 02(7.62,10) 03(12.7,10)
  silkscreen extent -0.75,0 15.24,12
PHOENIX_1803578 [mm]
  round 2 hole 1.2: 1(-1.905,-0.635) 2(1.905,-0.635)
  silkscreen extent -4.21,-4 4.21,1.66, body extent -4.21,-8.05 4.21,8.05, height 11.1
QFP50P1200X1200X160-64N [mm]
  rrect25% 1.5x0.254 smd mask-2539.97: 1(-5.67,3.75) 2(-5.67,3.25) 3(-5.67,2.75) 4(-5.67,2.25) 5(-5.67,1.75) 6(-5.67,1.25) 7(-5.67,0.75) 8(-5.67,0.25) 9(-5.67,-0.25) 10(-5.67,-0.75) 11(-5.67,-1.25) 12(-5.67,-1.75) 13(-5.67,-2.25) 14(-5.67,-2.75) 15(-5.67,-3.25) 16(-5.67,-3.75) 33(5.67,-3.75) 34(5.67,-3.25) 35(5.67,-2.75) 36(5.67,-2.25) 37(5.67,-1.75) 38(5.67,-1.25) 39(5.67,-0.75) 40(5.67,-0.25) 41(5.67,0.25) 42(5.67,0.75) 43(5.67,1.25) 44(5.67,1.75) 45(5.67,2.25) 46(5.67,2.75) 47(5.67,3.25) 48(5.67,3.75)
  rrect25% 0.254x1.5 smd mask-2539.97: 17(-3.75,-5.67) 18(-3.25,-5.67) 19(-2.75,-5.67) 20(-2.25,-5.67) 21(-1.75,-5.67) 22(-1.25,-5.67) 23(-0.75,-5.67) 24(-0.25,-5.67) 25(0.25,-5.67) 26(0.75,-5.67) 27(1.25,-5.67) 28(1.75,-5.67) 29(2.25,-5.67) 30(2.75,-5.67) 31(3.25,-5.67) 32(3.75,-5.67) 49(3.75,5.67) 50(3.25,5.67) 51(2.75,5.67) 52(2.25,5.67) 53(1.75,5.67) 54(1.25,5.67) 55(0.75,5.67) 56(0.25,5.67) 57(-0.25,5.67) 58(-0.75,5.67) 59(-1.25,5.67) 60(-1.75,5.67) 61(-2.25,5.67) 62(-2.75,5.67) 63(-3.25,5.67) 64(-3.75,5.67)
  silkscreen extent -7.44,-5 5,5, body extent -6,-6 6,6, height 1.6
REL_SPDT_5_1512 [mm] "RELAY, SPDT, 15.40x12.10x14.0mm, G8QN, SUN HOLD RAM"
  oval 2x2.5 hole 1.3: 1(0,2.5) 2(5.1,-10.2) 3(-5.1,-10.2) 4(-5.1,0) 5(5.1,0)
  silkscreen extent -6.1,-11.9 6.1,3.8, body extent -6,-11.8 6,3.7, height 14
RESC2012X65N [mm]
  rect 1x1.42 smd: 1(-0.935,0) 2(0.935,0)
  silkscreen extent -0.12,-0.7 0.12,0.7, body extent -1,-0.63 1,0.63, height 0.65
RESC3015X65N [mm]
  rect 0.98x1.72 smd: 1(-1.47,0) 2(1.47,0)
  silkscreen extent -0.66,-0.85 0.66,0.85, body extent -1.53,-0.77 1.53,0.77, height 0.65
RESC6331X70N [mm]
  rrect7% 1.9x3.37 smd: 1(-2.66,0) 2(2.66,0)
  silkscreen extent -3.15,-1.87 3.15,1.87
SAMTEC_MTSW-104-24-G-S-230 [mm]
  rect 1.8x1.8 hole 1.1 mask-2539.97: 01(3.81,0) 02(1.27,0) 03(-1.27,0) 04(-3.81,0)
  silkscreen extent -5.08,-1.27 5.83,1.27
SOIC127P602X172-8N [mm]
  rrect25% 1.64x0.59 smd: 0(-2.635,1.905) 1(-2.635,0.635) 2(-2.635,-0.635) 3(-2.635,-1.905) 4(2.635,-1.905) 5(2.635,-0.635) 6(2.635,0.635) 7(2.635,1.905)
  silkscreen extent -4.37,-2.52 1.99,2.59, body extent -3.01,-2.44 3.01,2.44, height 1.73
SOP65P640X120-17N [mm]
  rrect25% 1.57x0.39 smd mask-2539.97: 1(-2.87,2.275) 2(-2.87,1.625) 3(-2.87,0.975) 4(-2.87,0.325) 5(-2.87,-0.325) 6(-2.87,-0.975) 7(-2.87,-1.625) 8(-2.87,-2.275) 9(2.87,-2.275) 10(2.87,-1.625) 11(2.87,-0.975) 12(2.87,-0.325) 13(2.87,0.325) 14(2.87,0.975) 15(2.87,1.625) 16(2.87,2.275)
  rect 2.48x3.4 smd paste-3: 17(0,0)
  silkscreen extent -4.3,-2.8 2.2,2.8, body extent -3.2,-2.5 3.2,2.5, height 1.2
SOT95P240X111-3N [mm]
  rrect25% 1.23x0.6 smd: 1(-1.06,0.95) 2(-1.06,-0.95) 3(1.06,0)
  silkscreen extent -2.6,-1.46 0.65,1.46
SWROT_11MM [mm] "Alps Encoder+ sw"
  rect 2x2 hole 1.3 mask-2539.97: 1(-2.5,-7.7) 2(0,-7.7) 3(2.5,-7.7) 4(2.5,6.8) 5(-2.5,6.8)
  rect 3x3 hole 2.2 mask-2539.97: SH1(-6.2,0.5) SH2(6.2,0.5)
  silkscreen extent -6,-6.1 6,7, body extent -6.85,-7.83 6.81,7, height 21.2
TRANS_SS8050-G [mm]
  rect 0.8x0.6 smd: 1(-1.01,0.95) 2(-1.01,-0.95) 3(1.01,0)
  silkscreen extent -1.11,-1.45 0.65,2.35
"WL-SMRW_1206 dome_normal use" [mm] "SMD Mono-color Reverse mount LED, body 3.2x1.2mm"
  rect 1.5x1.6 smd: 1(-1.75,0) 2(1.75,0)
  silkscreen extent -0.65,-0.85 0.65,0.85, body extent -1.6,-0.8 1.6,0.8, height 1.85
XTAL_ABLS2-12.000MHZ-D4Y-T [mm]
  rect 5.6x2.1 smd: 1(-4.75,0) 2(4.75,0)
  silkscreen extent -5.7,-2.35 5.7,2.35, body extent -6.35,-2.35 6.35,2.35, height 3.16

## Part data
*1 "fuse 1": library part Component_1
C1 C2 C3 C5 C13 C26: library part EEEFN1H101L, "CAP ALUM 100UF 20% 50V SMD"
C4 C6 C7 C8 C9 C10 C11 C17 C18 C19 C20 C21 C22 C23 C24: library part CGA5L3X8R1H105M160AB, "1ÂµF Â±20% 50V Ceramic Capacitor X8R 1206 (3216 Metric)"
C12 C14 C15 C16 C25 C27 C28 C29: library part GRM21BC81C226ME44L, "SMD Capacitor X6S(EIA) with Capacitance: 22uF Tol. 20%. Rated Voltage: 16Vdc"
D1 D4 D5 D6 D7 D8 D9 D10 D11 D12 D13 D14 D15 D16 D17 D18 D19 D20 D21 D22 D23 D24 D25 D26 D27: library part 156120RS82500, "WL-SMRW Mono-color Reverse mount Waterclear, SMT, size 1206 dome, Red, 2V, 20°"
D2 D3 D28 D29: library part SMAJ26A, "400W, 30.4V, 5%, Unidirectional, TVS"
J1 J5 J6 J7 J8 J9 J10 J11 J12: library part 1715721
J4 J13: library part 1759020, "Pluggable Header 5.08mm 12AWG 320V 12A 3 Position COMBICON MSTB Series"
JP? JP? JP? JP?: library part HDRLP_F_1X3, "CONN, HEADER, Male, pitch: 2.54mm, 3POS"
K1 K2 K3 K4: library part RELAY_SPDT_5_1512_G8QN, "Relay, SPDT, 5P, 15.4X12.1mm, 16V/30A"
P1 P2 P3 P4 P5 P6 P7 P8 P9 P10 P11 P12 P13: library part 1803578, "2 Position Terminal Block Plug, Female Sockets 0.150 (3.81mm) 180Â° Free Hanging (In-Line)"
Q1 Q2 Q3 Q4 Q23 Q24 Q25 Q26 Q27 Q28: "N-Channel 60V 280mA (Ta) 350mW (Ta) Surface Mount SOT-23-3 (TO-236)"
Q5 Q6 Q7 Q8 Q9 Q10 Q11 Q12 Q13 Q14 Q15 Q16 Q17 Q18 Q19 Q20 Q21 Q22 Q29 Q30: library part SS8050-G, "Bipolar (BJT) Transistor NPN 25 V 1.5 A 100MHz 300 mW Surface Mount SOT-23-3"
R1 R2 R3 R4 R5 R8 R9 R10 R11 R16 R17 R18 R19 R20 R21 R22 R23 R24 R25 R26 R27 R28 R29 R30 R31 R32 R33 R34 R35 R36 R37 R38 R39 R40 R41 R42 R43 R44 R45 R46 R47 R48 R49 R50 R51 R52 R53 R54 R55 R56 R57 R58 R67 R68 R69 R70 R79 R80 R81 R82 R91 R92 R93 R94 R103 R104 R105 R106 R107 R108 R109 R110 R115 R116 R117 R118 R119 R120: library part CPF1206B10KE1, "Res Thin Film 1206 10K Ohm 0.1% 1/8W Â±25ppm/Â°C Molded SMD SMD Paper T/R"
R6 R7 R12 R13 R14 R15 R111 R112 R113 R114: library part CRGCQ0805J470R, "Fixed Resistor CRGCQ 0805 470R 5%"
R59 R60 R61 R62 R63 R64 R65 R66 R71 R72 R73 R74 R75 R76 R77 R78 R83 R84 R85 R86 R87 R88 R89 R90 R95 R96 R97 R98 R99 R100 R101 R102: library part 5-2176246-2, "18 kOhms Â±5% 1.5W Chip Resistor 2512 (6432 Metric) Pulse Withstanding Thick Film"
SW1: library part SWROT_11MM, "SWITCH, ROTARY Encoder, 11mm Metal Shaft"
U1: library part VREG_LFXX_TO252, "REG, Linear, LDO0.45V, 0.5A, TO-252"
U2: library part VREG_AMS1117_DPACK3
U3: "ARMÂ® CortexÂ®-M0+ STM32G0 Microcontroller IC 32-Bit Single-Core 64MHz 128KB (128K x 8) FLASH 64-LQFP (10x10)"
U4 U13: "40-V, 6-A H-bridge motor driver with integrated current sensing feedback"
U5 U6 U7 U8 U9 U10 U11 U12: library part OPTC_TR4P_EL817_SMD, "OPTOCOUPLER, TRANSISTOR, 4PIN"
Y1: library part ABLS2-12.000MHZ-D4Y-T, "HC/49US (AT49) LOW PROFILE SURFACE MOUNT MICROPROCESSOR CRYSTAL"

## Via types
v1: diameter 1.2, hole 0.6, Top Layer to Bottom Layer, tented both sides, 50 vias
v2: diameter 1.2, hole 0.6, Top Layer to Bottom Layer, 4 vias

## Nets (pads, with @x,y where several pads share a name; then routed paths per layer and width w, separated by ;. In a path a pad name is that pad's centre, name@x,y a point inside that pad or via, vN(x,y) a via of type N, cw(c..) or ccw(c..) an arc to the next point about the centre after c; other vN are vias at no path point)
3.3v: C5.1 C8.2 C9.2 C10.2 EEPROM1.7 J3.04 Q1.1 Q2.1 Q3.1 Q4.1 Q23.1 Q24.1 Q25.1 Q26.1 Q27.1 Q28.1 R5.2 R6.2 R7.2 R10.2 R11.2 R15.2 R18.2 R19.2 R54.2 R57.1 R58.2 R109.2 R110.2 R114.2 R117.2 R118.2 U2.4 U3.6 U3.7 U3.8 U4.5 U5.4 U6.4 U7.4 U8.4 U9.4 U10.4 U11.4 U12.4 U13.5 | length 455.5
  Top Layer w0.254: -48.455,8.4 -48.455,9.646 ; v1(-47.396,8.4) -48.349,8.4 ccw(c-48.349,8.294) -48.455,8.294 -48.455,5.945 -47.755,5.245 Q2.1@-47.44,5.245 -46.225,5.245 -45.9,4.92 -44.89,4.92 R11.2@-44.6,4.63 ; R10.2@-44.6,9.059 -44.89,9.349 -45.927,9.349 -46.225,9.646 Q1.1@-47.44,9.646 -48.455,9.646 ; R110.2@-44.6,13.487 -44.89,13.777 -45.954,13.777 -46.225,14.048 Q26.1@-47.44,14.048 -48.455,14.048 ; R109.2@-44.6,17.916 -44.89,18.206 -45.981,18.206 -46.225,18.449 Q25.1@-47.44,18.449 -48.455,18.449 ; R118.2@-44.6,22.344 -44.89,22.634 -46.009,22.634 -46.225,22.851 Q28.1@-47.44,22.851 -48.455,22.851 ; R117.2@-44.6,26.773 -44.89,27.063 -46.036,27.063 -46.225,27.252 Q27.1@-47.44,27.252 -48.455,27.252 ; R19.2@-44.6,31.201 -44.889,31.49 -46.06,31.49 -46.224,31.654 Q4.1@-47.44,31.654 -48.455,31.654 ; R18.2@-44.6,35.63 -44.875,35.905 -46.06,35.905 -46.21,36.055 Q3.1@-47.44,36.055 -47.54,35.955 -48.221,35.955 -48.455,35.721 -48.455,31.654 ; v1(-30.1,10.692) -30.1,9.636 -31.781,7.955 -31.781,4.932 -30.312,3.463 -28.692,3.463 -27.765,4.39 R6.2@-27.765,4.6 -25.935,4.6 R7.2@-25.9,4.565 ; R114.2@-20.5,-30.935 -20.49,-30.925 U13.5@-17.37,-30.925 ; U3.8@-13.33,-2.95 U3.7@-13.33,-3.45 U3.6@-13.33,-3.95 -12.07,-3.95 -11.82,-4.2 -10.4,-4.2 v1(-9.7,-4.9) ; R15.2@-2.5,-30.935 -2.49,-30.925 U4.5@0.63,-30.925 ; -48.455,9.646 -48.455,14.048 ; -48.455,14.048 -48.455,18.449 ; -48.455,18.449 -48.455,22.851 ; -48.455,22.851 -48.455,27.252 ; -48.455,27.252 -48.455,31.654
  Top Layer w0.5: v2(-47.396,2.8) -39.678,-4.918 ccw(c-38.998,-4.239) -38.998,-5.2 J3.04@-35.414,-5.2 ; v1(-40.07,10) -35.404,10 -34.324,11.08 -32.262,11.08 -31.748,10.566 -30.226,10.566 v1(-30.1,10.692) -30.008,10.6 -28.886,10.6 EEPROM1.7@-28.593,10.307 ; EEPROM1.7@-28.593,10.307 -28.548,10.262 EEPROM1.7@-28.023,10.262 ; v1@-22.26,-17.043 -22.26,-30.35 -21.677,-30.933 -20.512,-30.933 R114.2@-20.51,-30.935 ; R5.2@-9.7,-3.122 v1(-9.7,-4.9) -7.764,-6.836 -7.764,-9.213 -7.172,-9.806 -0.962,-9.806 -0.379,-9.223 -0.379,2.981 1.83,5.19 R54.2@1.83,6.8 ; v1(-4.3,-19.3) -4.3,-20.661 -4.539,-20.9 -4.539,-28.41 -4.161,-28.788 -4.161,-30.272 -3.634,-30.798 -2.637,-30.798 R15.2@-2.5,-30.935 ; Q24.1@2.55,-5.56 2.55,-7.91 2.065,-8.395 2.065,-9.205 2.27,-9.41 2.721,-9.41 2.777,-9.466 3.155,-9.466 v1(3.289,-9.6) 4.089,-10.4 5.221,-10.4 12.8,-10.4 13.978,-9.222 ccw(c13.851,-9.096) 14.03,-9.096 14.03,-8.504 cw(c14.208,-8.504) 14.082,-8.378 14.55,-7.91 Q23.1@14.55,-5.56 ; v1(19.1,-38.6) 19.1,-38.555 U9.4@25.875,-38.555 30.1,-38.555 30.1,-28.395 ; U11.4@25.875,-28.395 30.1,-28.395 ; U10.4@25.875,-18.235 30.1,-18.235 ; U12.4@25.875,-8.075 30.1,-8.075 ; U8.4@25.875,2.085 30.1,2.085 ; U5.4@25.875,12.245 30.1,12.245 ; U7.4@25.875,22.405 30.1,22.405 ; U6.4@25.875,32.565 30.1,32.565 30.1,22.405 ; 30.1,-28.395 30.1,-18.235 ; 30.1,-18.235 30.1,-8.075 ; 30.1,-8.075 30.1,2.085 ; 30.1,2.085 30.1,12.245 ; 30.1,12.245 30.1,22.405
  Bottom Layer w0.5: v1@-47.4,8.4 -47.4,8.49 cw(c-47.376,8.49) -47.393,8.507 -46.05,9.85 cw(c-45.688,9.488) -45.688,10 v1(-40.07,10) ; v2(-47.396,2.8) v1(-47.396,8.4) ; J3.04@-35.414,-5.2 -35.414,-6.566 ccw(c-35.314,-6.566) -35.385,-6.636 -35.151,-6.871 ccw(c-35.08,-6.8) -35.08,-6.9 -29.422,-6.9 cw(c-29.422,-7.744) -28.825,-7.147 -26.835,-9.138 cw(c-27.402,-9.705) -26.6,-9.705 -26.6,-12.362 ccw(c-25.798,-12.362) -26.365,-12.929 -22.264,-17.03 ccw(c-22.25,-17.017) -22.237,-17.03 -22.13,-16.923 cw(c-22.098,-16.955) -22.098,-16.909 -21.623,-16.909 ccw(c-21.623,-16.907) -21.621,-16.909 -21.614,-16.902 cw(c-21.612,-16.904) -21.612,-16.901 -4.782,-16.901 ; v1(-30.1,10.692) -30.042,10.75 -28.75,10.75 -28.5,11 -25.29,11 cw(c-25.29,10.3) -24.795,10.795 -22.957,8.957 cw(c-22.974,8.94) -22.95,8.94 -22.95,8.86 ccw(c-22.926,8.86) -22.943,8.843 -20.235,6.135 ccw(c-20.15,6.221) -20.15,6.1 -19.737,6.1 cw(c-19.737,6.01) -19.674,6.074 -19.462,5.862 cw(c-19.526,5.799) -19.436,5.799 C8.2@-19.436,1.528 ; C8.2@-19.436,1.354 C10.2@-19.436,-0.875 -19.436,-3.193 ccw(c-19.419,-3.193) -19.431,-3.205 -19.392,-3.244 cw(c-19.404,-3.255) -19.388,-3.255 -19.387,-4.517 ccw(c-19.213,-4.517) -19.336,-4.64 -18.928,-5.049 ccw(c-18.804,-4.926) -18.804,-5.1 -15.846,-5.1 ccw(c-15.846,-4.963) -15.749,-5.06 v1@-15.389,-4.7 ; v1(-15.2,-4.7) -10.118,-4.7 cw(c-10.118,-4.768) -10.069,-4.72 -9.903,-4.887 ccw(c-9.87,-4.854) -9.87,-4.9 -9.719,-4.9 cw(c-9.719,-4.946) -9.687,-4.913 -8.755,-5.845 ccw(c-8.502,-5.592) -8.502,-5.95 C5.1@-5.1,-5.95 -0.877,-5.95 cw(c-0.877,-7.196) 0.004,-6.315 v1(3.289,-9.6) ; v1(-4.3,-19.3) -4.366,-19.234 -4.366,-17.95 -4.616,-17.7 -4.616,-16.901 16.306,-16.901 cw(c16.306,-17.131) 16.468,-16.968 17.007,-17.507 cw(c16.844,-17.669) 17.074,-17.669 17.074,-21.525 ccw(c17.297,-21.525) 17.139,-21.683 17.663,-22.206 cw(c17.505,-22.364) 17.728,-22.364 17.728,-26.334 ccw(c17.951,-26.334) 17.793,-26.492 18.317,-27.016 cw(c18.159,-27.173) 18.382,-27.173 18.382,-31.144 ccw(c18.605,-31.144) 18.447,-31.301 18.971,-31.825 cw(c18.813,-31.983) 19.036,-31.983 19.036,-36.036 ccw(c19.058,-36.036) 19.042,-36.052 19.094,-36.103 cw(c19.078,-36.118) 19.1,-36.118 v1(19.1,-38.6)
  other v1: -22.25,-17.043
5v: C3.1 J2.04 JP?.1 R8.2 R9.2 R16.2 R17.2 R22.2 R23.2 R24.2 R25.2 R26.2 R27.2 R28.2 R29.2 R38.2 R39.2 R40.2 R41.2 R42.2 R43.2 R44.2 R45.2 R55.2 R56.2 R107.2 R108.2 R115.2 R116.2 U1.3 | length 408.3
  Top Layer w0.5: -57.65,-23.4 -57.65,-31.658 ccw(c-57.428,-31.658) -57.585,-31.815 -57.065,-32.335 ccw(c-56.908,-32.178) -56.908,-32.4 -54.177,-32.4 ccw(c-54.177,-31.731) -53.704,-32.204 -52.077,-30.577 cw(c-51.746,-30.908) -51.746,-30.44 JP?.1@-50,-30.44 ; -57.65,-14.4 -57.65,-22.871 ccw(c-57.121,-22.871) -57.121,-23.4 -52.637,-23.4 ccw(c-52.637,-22.731) -52.164,-23.204 -50.428,-21.468 cw(c-50.36,-21.537) -50.36,-21.44 JP?.1@-50,-21.44 ; -57.65,-5.4 -57.65,-13.871 ccw(c-57.121,-13.871) -57.121,-14.4 -52.637,-14.4 ccw(c-52.637,-13.731) -52.164,-14.204 -50.428,-12.468 cw(c-50.36,-12.537) -50.36,-12.44 JP?.1@-50,-12.44 ; -57.65,8 -57.65,-4.871 ccw(c-57.121,-4.871) -57.121,-5.4 -52.637,-5.4 ccw(c-52.637,-4.731) -52.164,-5.204 -50.428,-3.468 cw(c-50.36,-3.537) -50.36,-3.44 JP?.1@-50,-3.44 ; -57.65,17.2 -57.65,8.241 ccw(c-57.409,8.241) -57.409,8 -55.386,8 ccw(c-55.386,8.361) -55.131,8.106 -54.284,8.953 cw(c-54.028,8.697) -54.028,9.059 -51.849,9.059 cw(c-51.849,8.91) -51.7,8.91 R9.2@-51.7,7.57 ; -57.65,26.2 -57.65,34.322 cw(c-57.341,34.322) -57.56,34.54 -56.8,35.3 -52.603,35.3 -52.513,35.39 -51.974,35.39 ccw(c-51.974,35.472) -51.916,35.414 R16.2@-51.7,35.63 ; R108.2@-51.7,16.427 -51.7,17.767 ccw(c-51.849,17.767) -51.849,17.916 -54.22,17.916 ccw(c-54.22,17.671) -54.392,17.844 -54.965,17.272 cw(c-55.138,17.444) -55.138,17.2 -57.389,17.2 cw(c-57.389,17.461) -57.65,17.461 -57.65,25.939 cw(c-57.389,25.939) -57.389,26.2 -55.118,26.2 ccw(c-55.118,26.396) -54.979,26.257 -54.521,26.716 cw(c-54.383,26.577) -54.383,26.773 -51.849,26.773 cw(c-51.849,26.624) -51.7,26.624 R116.2@-51.7,25.284 ; R17.2@-51.7,34.141 R16.2@-51.7,35.383 ; v1(-39.219,13.328) -39.205,13.314 -35.568,13.314 v1(-35.554,13.3) ; v1(-6.001,10.399) 19.213,10.399 19.378,10.564 ; R56.2@7,-2.53 R55.2@12,-2.53 12,2.339 19.378,9.717 19.378,10.564 ; v1(18.673,33.3) 18.686,33.3 20.4,31.586 20.4,21.81 19.932,21.342 19.932,11.965 19.378,11.411 19.378,10.564
  Bottom Layer w0.5: C3.1@-55.55,-36.6 -55.55,-34.305 cw(c-54.934,-34.305) -55.37,-33.87 -52.132,-30.632 cw(c-51.801,-30.964) -51.801,-30.495 -50.063,-30.495 ccw(c-50.063,-30.476) -50.05,-30.49 JP?.1@-50,-30.44 ; JP?.1@-50,-3.44 -51.8,-1.64 cw(c-51.317,-1.157) -52,-1.157 -52,5.617 cw(c-51.317,5.617) -51.8,6.1 -50.106,7.794 cw(c-49.85,7.538) -49.85,7.9 -48.65,7.9 -48.5,7.75 -48.5,2.751 ccw(c-46.929,2.751) -48.04,1.64 -44.011,-2.389 ccw(c-43.742,-2.119) -43.742,-2.5 -42.369,-2.5 ccw(c-42.369,-2.39) -42.291,-2.468 -42.012,-2.189 ccw(c-42.043,-2.159) -42,-2.159 U1.3@-42,-2 ; -48.5,7.9 -48.5,10.211 cw(c-47.562,10.211) -48.225,10.875 -46.027,13.073 cw(c-45.364,12.409) -45.364,13.347 -39.238,13.347 v1(-39.219,13.328) ; v1@-35.511,13.3 -14.613,13.3 -14.32,13.007 -14.32,11.313 ccw(c-14.047,11.313) -14.24,11.12 -13.599,10.479 ccw(c-13.406,10.672) -13.406,10.399 v1(-6.001,10.399) ; v1(18.673,33.3) 18.673,39.073 19.675,40.075 cw(c19.94,39.81) 19.94,40.185 30.929,40.185 cw(c30.929,39.796) 31.204,40.071 32.116,39.159 ccw(c32.391,39.434) 32.391,39.045 R22.2@32.6,39.045 33.883,39.045 cw(c33.883,38.828) 34.1,38.828 34.1,36.876 ccw(c34.103,36.876) 34.101,36.873 34.109,36.865 34.11,36.864 34.11,33.814 ; R45.2@32.6,-37.155 33.963,-37.155 ccw(c33.963,-37.018) 34.1,-37.018 34.1,-35.786 cw(c34.103,-35.786) 34.101,-35.783 34.109,-35.775 ccw(c34.107,-35.773) 34.11,-35.773 34.11,-32 ; R44.2@32.6,-32.075 34.035,-32.075 ccw(c34.035,-32) 34.11,-32 ; R43.2@32.6,-26.995 33.959,-26.995 34.11,-27.146 34.11,-32 ; R42.2@32.6,-21.915 33.959,-21.915 34.11,-21.764 34.11,-16.986 ; R41.2@32.6,-16.835 33.959,-16.835 cw(c33.959,-16.986) 34.11,-16.986 ; R40.2@32.6,-11.755 34.055,-11.755 cw(c34.055,-11.8) 34.1,-11.8 ; R39.2@32.6,-6.675 33.959,-6.675 cw(c33.959,-6.826) 34.11,-6.826 ; R38.2@32.6,-1.595 34.105,-1.595 cw(c34.105,-1.6) 34.11,-1.6 ; R29.2@32.6,3.485 34.095,3.485 ccw(c34.095,3.5) 34.11,3.5 ; R28.2@32.6,8.565 34.045,8.565 cw(c34.045,8.5) 34.11,8.5 ; R27.2@32.6,13.645 34.065,13.645 cw(c34.065,13.6) 34.11,13.6 ; R26.2@32.6,18.725 33.985,18.725 cw(c33.985,18.6) 34.11,18.6 ; R25.2@32.6,23.805 34.005,23.805 cw(c34.005,23.7) 34.11,23.7 ; R24.2@32.6,28.885 33.959,28.885 cw(c33.959,28.734) 34.11,28.734 ; R23.2@32.6,33.965 33.959,33.965 cw(c33.959,33.814) 34.11,33.814 ; 34.11,-26.995 34.11,-21.915 ; 34.1,-11.8 34.1,-10.386 cw(c34.103,-10.386) 34.101,-10.383 34.109,-10.375 ccw(c34.107,-10.373) 34.11,-10.373 34.11,-6.826 ; 34.1,-11.8 34.1,-13.924 ccw(c34.103,-13.924) 34.101,-13.927 34.109,-13.935 34.11,-13.936 34.11,-16.986 ; 34.11,-6.826 34.11,-1.6 ; 34.11,-1.6 34.11,3.5 ; 34.11,3.5 34.11,8.5 ; 34.11,8.5 34.11,13.6 ; 34.11,13.6 34.11,18.6 ; 34.11,18.6 34.11,23.7 ; 34.11,23.7 34.11,28.734 ; 34.11,28.734 34.11,33.814
12v: *1.4 C1.1 C2.1 D2.C D3.C D28.C D29.C JP?.3 K1.4 K2.4 K3.4 K4.4 U1.1 U2.3 | length 175.2
  Top Layer w0.5: D3.C@-37.715,15.5 -37.525,15.69 K2.4@-37.525,21 -37.525,21.25 -35.175,23.6 -23.325,23.6 ; D2.C@-23.515,15.5 -23.325,15.69 K1.4@-23.325,21 -23.325,23.6 ; D29.C@-9.315,15.5 -9.125,15.69 K4.4@-9.125,21 -9.125,23.6 ; D28.C@4.885,15.5 5.075,15.69 K3.4@5.075,21 5.075,21.25 2.725,23.6 -9.125,23.6 ; -23.325,23.6 -9.125,23.6
  Bottom Layer w0.5: JP?.3@-50,-25.36 -48.02,-23.38 ccw(c-48.551,-22.849) -47.8,-22.849 -47.8,-16.52 ccw(c-47.848,-16.52) -47.814,-16.486 -47.926,-16.374 ccw(c-47.96,-16.408) -47.96,-16.36 JP?.3@-50,-16.36 ; JP?.3@-50,-7.36 -47.96,-7.36 cw(c-47.96,-7.408) -47.926,-7.374 -47.814,-7.486 cw(c-47.848,-7.52) -47.8,-7.52 -47.8,-16.5 ; JP?.3@-50,1.64 -48.02,-0.34 cw(c-48.551,-0.871) -47.8,-0.871 -47.8,-5.951 ccw(c-47.783,-5.951) -47.771,-5.964 -47.536,-5.729 cw(c-47.466,-5.8) -47.466,-5.7 -43.464,-5.7 ccw(c-43.464,-4.659) -42.727,-5.395 -40.142,-2.81 cw(c-39.756,-3.195) -39.756,-2.65 -37.769,-2.65 ccw(c-37.769,-2.54) -37.691,-2.618 -37.432,-2.359 cw(c-37.419,-2.372) -37.4,-2.372 -37.4,-7.63 ccw(c-37.109,-7.63) -37.315,-7.835 -36.612,-8.538 ccw(c-36.457,-8.382) -36.457,-8.602 -35.727,-8.602 cw(c-35.727,-8.693) -35.636,-8.693 -35.636,-12.713 cw(c-35.811,-12.713) -35.687,-12.837 -36.099,-13.249 ccw(c-35.975,-13.373) -36.15,-13.373 C2.1@-36.15,-21.9 ; -47.8,-7.5 -47.8,-5.993 ; K2.4@-37.525,21 -37.525,11.641 ccw(c-37.004,11.641) -37.373,11.273 -36.152,10.053 cw(c-36.521,9.684) -36,9.684 -36,1.142 cw(c-36.147,1.142) -36.043,1.038 -36.429,0.651 cw(c-36.433,0.655) -36.433,0.65 -36.448,0.65 ccw(c-36.448,0.645) -36.451,0.649 -37.256,-0.156 ccw(c-37.04,-0.372) -37.345,-0.372 -37.345,-1.938 cw(c-37.364,-1.938) -37.351,-1.951 -37.395,-1.995 ccw(c-37.381,-2.008) -37.4,-2.008 U1.1@-37.4,-2.327 ; -35.8,8.9 -28.114,8.9 cw(c-28.114,8.729) -27.993,8.85 -27.593,8.45 ccw(c-27.472,8.571) -27.472,8.4 U2.3@-26.5,8.4 ; *1.4@-35.636,-8.602 -35.48,-8.446 cw(c-35.438,-8.488) -35.438,-8.429 -33.294,-8.429 cw(c-33.294,-8.488) -33.252,-8.446 *1.4@-33.096,-8.602
24v: "fuse 1.2" *1.1 R1.2 R2.2 | length 19.1
  Top Layer w0.254: *1.1@-33.096,-27.144 -33.096,-30.06 R2.2@-32.9,-30.06
  Bottom Layer w0.254: R1.2@-38.96,-30 -38.96,-29.705 cw(c-38.881,-29.705) -38.937,-29.649 -38.62,-29.333 cw(c-38.564,-29.389) -38.564,-29.31 -38.302,-29.31 ccw(c-38.302,-29.231) -38.246,-29.286 -36.663,-27.703 cw(c-36.583,-27.783) -36.583,-27.67 -36.209,-27.67 ccw(c-36.209,-27.557) -36.129,-27.637 -35.533,-27.041 cw(c-35.364,-27.21) -35.364,-26.971 -33.294,-26.971 cw(c-33.294,-27.03) -33.252,-26.988 *1.1@-33.096,-27.144 ; *1.1@-33.269,-26.971 -33.069,-26.971 ccw(c-33.069,-26.917) -33.031,-26.955 -32.61,-26.535 ccw(c-32.672,-26.473) -32.585,-26.473 -32.585,-26.186 cw(c-32.498,-26.186) -32.56,-26.125 -29.94,-23.505 cw(c-29.36,-24.086) -29.36,-23.265 -26.3,-23.265
24v_jack1: C13.1 C14.2 C15.2 P2.2 U4.11 | length 26
  Top Layer w0.254: U4.11@6.37,-31.575 9.675,-31.575 9.698,-31.598 ccw(c9.704,-31.591) 9.704,-31.6 11.77,-31.6 cw(c11.77,-31.83) 12,-31.83 12,-35.62 ccw(c12.821,-35.62) 12.24,-36.2 P2.2@14.405,-38.365
  Bottom Layer w1.5: C13.1@12.05,-26.6 12.05,-26.652 cw(c12.036,-26.652) 12.046,-26.661 11.877,-26.831 ccw(c11.923,-26.877) 11.857,-26.877 11.857,-31.127 ccw(c12.727,-31.127) 12.112,-31.742 14.15,-33.78 cw(c13.535,-34.395) 14.405,-34.395 P2.2@14.405,-38.305
24v_jack2: C26.1 C27.2 C28.2 P8.2 U13.11 | length 26
  Top Layer w0.254: U13.11@-11.63,-31.575 -9.419,-31.575 -8.3,-31.583 -6.23,-31.598 cw(c-6.232,-31.83) -6,-31.83 -6,-35.62 ccw(c-5.179,-35.62) -5.76,-36.2 P8.2@-3.595,-38.365
  Bottom Layer w1.5: C26.1@-5.95,-26.6 -5.95,-26.652 cw(c-5.964,-26.652) -5.954,-26.661 -6.123,-26.831 ccw(c-6.077,-26.877) -6.143,-26.877 -6.143,-31.127 ccw(c-5.273,-31.127) -5.888,-31.742 -3.85,-33.78 cw(c-4.465,-34.395) -3.595,-34.395 P8.2@-3.595,-38.305
CPH1: C16.2 U4.13 | length 4.4
  Top Layer w0.254: U4.13@6.37,-30.275 8.348,-30.275 8.559,-30.064 9.116,-30.064 10.1,-29.08 C16.2@10.1,-28.9
CPH2: C29.2 U13.13 | length 4.4
  Top Layer w0.254: U13.13@-11.63,-30.275 -9.652,-30.275 -9.441,-30.064 -8.884,-30.064 -7.9,-29.08 C29.2@-7.9,-28.9
CPL1: C16.1 U4.14 | length 2.3
  Top Layer w0.254: U4.14@6.398,-29.597 6.426,-29.625 7.575,-29.625 7.692,-29.508 7.872,-29.508 8.3,-29.08 C16.1@8.3,-28.9
CPL2: C29.1 U13.14 | length 2.3
  Top Layer w0.254: U13.14@-11.63,-29.625 -10.425,-29.625 -10.308,-29.508 -10.128,-29.508 -9.7,-29.08 C29.1@-9.7,-28.9
ENC-A: Q23.3 R55.1 SW1.1 | length 6.6
  Top Layer w0.254: SW1.1@12,-7.7 R55.1@12,-5.47 12.37,-5.47 14.4,-3.44 Q23.3@15.5,-3.44
ENC-B: Q24.3 R56.1 SW1.3 | length 6.6
  Top Layer w0.254: Q24.3@3.5,-3.44 4.6,-3.44 6.63,-5.47 R56.1@7,-5.47 SW1.3@7,-7.7
GND: *1.2 *1.3 C1.2 C2.2 C3.2 C4.1 C5.2 C6.1 C7.1 C8.1 C9.1 C10.1 C11.1 C12.1 C13.2 C14.1 C25.1 C26.2 C27.1 D1.1 EEPROM1.0 EEPROM1.1 EEPROM1.2 EEPROM1.3 EEPROM1.6 J2.01 J3.01 P1.1 P2.1 P5.1 P6.1 P8.1 P11.1 P12.1 Q5.2 Q6.2 Q7.2 Q8.2 Q9.2 Q10.2 Q11.2 Q12.2 Q13.2 Q14.2 Q15.2 Q16.2 Q17.2 Q18.2 Q19.2 Q20.2 Q21.2 Q22.2 Q29.2 Q30.2 R3.1 R4.2 R13.2 R14.1 R67.1 R68.1 R69.1 R70.1 R79.1 R80.1 R81.1 R82.1 R91.1 R92.1 R93.1 R94.1 R103.1 R104.1 R105.1 R106.1 R112.2 R113.1 SW1.2 SW1.5 SW1.SH1 SW1.SH2 U1.4 U2.1 U3.9 U4.9 U4.15 U4.16 U4.17 U13.9 U13.15 U13.16 U13.17 | length 45.7
  Top Layer w0.254: v1(-15.15,-2.45) U3.9@-13.33,-2.45 -12.179,-2.45 v1(-11.6,-3.029) ; U13.17@-14.5,-30.6 -13.781,-29.881 -13.781,-19.132 -13.558,-18.909 -12.116,-18.909 R14.1@-11.235,-19.79 ; R14.1@-11.235,-20 R14.1@-11.235,-19.79 ; C12.1@-7.7,-20 -7.7,-19.82 -8.611,-18.909 -10.354,-18.909 R14.1@-11.235,-19.79 ; R68.1@18.6,34.83 R70.1@20.9,34.83 ; R91.1@22.45,-30.635 R93.1@24.656,-30.635 ; R103.1@22.45,-20.475 R105.1@24.656,-20.475 ; R92.1@22.45,-10.315 R94.1@24.656,-10.315 ; R104.1@22.45,-0.155 R106.1@24.656,-0.155 ; R80.1@22.45,10.005 R82.1@24.656,10.005 ; R67.1@22.45,20.165 R69.1@24.656,20.165 ; R79.1@22.45,30.325 R81.1@24.656,30.325
  Bottom Layer w0.254: C9.1@-16.764,-3.2 C10.1@-16.764,-0.875 C8.1@-16.764,1.5
  other v1: -22.555,0.787 -34.6,7.1 -30.2,7.3 -4.115,13.183 -25.578,15.621 2.845,15.621 -11.379,15.672 -35.535,15.697 23.1,35.3
  other v2: -25.437,-10.3 -44.018,2.108 -37.559,7.141
JACK-1-ENC-A: P4.2 Q2.3 R9.1 | length 7.3
  Top Layer w0.254: P4.2@-55.565,6.195 -54.157,4.786 ccw(c-53.779,5.164) -53.779,4.63 R9.1@-51.7,4.63 -51.518,4.63 ccw(c-51.518,5.062) -51.202,4.768 -50.048,6.009 -49.892,6.176 cw(c-49.85,6.137) -49.85,6.195 Q2.3@-49.56,6.195
JACK-1-ENC-B: P4.1 Q1.3 R8.1 | length 7.4
  Top Layer w0.254: P4.1@-55.565,10.005 -53.771,11.799 cw(c-53.289,11.318) -53.289,11.999 R8.1@-51.7,11.999 -51.504,11.999 cw(c-51.504,11.579) -51.207,11.876 -50.127,10.795 ccw(c-50.064,10.858) -50.064,10.769 -49.757,10.769 cw(c-49.757,10.71) -49.716,10.752 Q1.3@-49.56,10.596
JACK-2-ENC-A: P10.2 Q26.3 R108.1 | length 7.3
  Top Layer w0.254: P10.2@-55.565,15.195 -54.028,13.658 ccw(c-53.616,14.07) -53.616,13.487 R108.1@-51.7,13.487 -51.54,13.487 ccw(c-51.54,13.98) -51.185,13.638 -49.897,14.975 cw(c-49.844,14.924) -49.844,14.998 Q26.3@-49.56,14.998
JACK-2-ENC-B: P10.1 Q25.3 R107.1 | length 7.3
  Top Layer w0.254: P10.1@-55.565,19.005 -53.899,20.671 cw(c-53.453,20.224) -53.453,20.856 R107.1@-51.7,20.856 -51.536,20.856 cw(c-51.536,20.359) -51.185,20.71 -49.897,19.422 ccw(c-49.844,19.475) -49.844,19.399 Q25.3@-49.56,19.399
jack_extend1: P3.1 U4.8
jack_extend2: P9.1 U13.8
jack_retract1: P3.2 U4.10 | length 10.1
  Top Layer w0.39: P3.2@5.405,-38.365 7.9,-38.365 7.9,-32.378 ccw(c7.747,-32.378) 7.747,-32.225 U4.10@6.37,-32.225
jack_retract2: P9.2 U13.10 | length 10.2
  Top Layer w0.39: P9.2@-12.595,-38.365 -10.049,-38.365 -10.049,-32.383 ccw(c-10.207,-32.383) -10.207,-32.225 U13.10@-11.63,-32.225
Motor1_NC: J4.03 K1.3 | length 7.7
  Bottom Layer w2: K1.3@-23.325,31.2 -20.553,31.2 ccw(c-20.553,31.508) -20.245,31.508 J4.03@-20.245,36
Motor1_NO: J4.01 K2.3 | length 11.7
  Bottom Layer w2: K2.3@-37.525,31.2 -30.885,31.2 ccw(c-30.885,31.68) -30.405,31.68 J4.01@-30.405,36
Motor2_NC: J13.01 K3.3 | length 7.7
  Bottom Layer w2: K3.3@5.075,31.2 7.847,31.2 ccw(c7.847,31.508) 8.155,31.508 J13.01@8.155,36
Motor2_NO: J13.03 K4.3 | length 11.7
  Bottom Layer w2: K4.3@-9.125,31.2 -2.485,31.2 ccw(c-2.485,31.68) -2.005,31.68 J13.03@-2.005,36
MOTOR-1-ENC-A: P7.2 Q4.3 R17.1 | length 7.4
  Top Layer w0.254: P7.2@-55.565,33.195 -54.064,33.195 -52.07,31.201 R17.1@-51.7,31.201 -51.33,31.201 -50.101,32.431 -49.733,32.431 Q4.3@-49.56,32.604
MOTOR-1-ENC-B: P7.1 Q3.3 R16.1 | length 7.3
  Top Layer w0.254: P7.1@-55.565,37.005 -53.635,37.005 -52.07,38.57 R16.1@-51.7,38.57 -51.33,38.57 -50.048,37.191 -49.875,37.005 Q3.3@-49.56,37.005
MOTOR-2-ENC-A: P13.2 Q28.3 R116.1 | length 7.3
  Top Layer w0.254: P13.2@-55.565,24.195 -53.899,22.529 ccw(c-53.453,22.976) -53.453,22.344 R116.1@-51.7,22.344 -51.536,22.344 ccw(c-51.536,22.841) -51.185,22.49 -49.897,23.778 cw(c-49.844,23.725) -49.844,23.801 Q28.3@-49.56,23.801
MOTOR-2-ENC-B: P13.1 Q27.3 R115.1 | length 7.3
  Top Layer w0.254: P13.1@-55.565,28.005 -54.028,29.542 cw(c-53.616,29.13) -53.616,29.713 R115.1@-51.7,29.713 -51.54,29.713 cw(c-51.54,29.22) -51.185,29.562 -49.897,28.225 ccw(c-49.844,28.276) -49.844,28.202 Q27.3@-49.56,28.202
NetC4_2: C4.2 R2.1 R3.2 U3.47 | length 44.9
  Top Layer w0.254: C4.2@-35.064,-30.5 -34.9,-30.5 R3.2@-34.9,-33 ; v1(-34.9,-34.671) R3.2@-34.9,-33 ; R2.1@-32.9,-33 R3.2@-34.9,-33 ; v1(-27.9,-10.8) -27.9,-9.364 cw(c-25.36,-9.364) -27.156,-7.568 -25.789,-6.201 -25.789,-6.199 -25.54,-5.95 U3.47@-24.67,-5.95
  Bottom Layer w0.254: v1(-34.9,-34.671) -32.019,-34.671 ccw(c-32.019,-33.898) -31.473,-34.445 -24.214,-27.186 ccw(c-25.705,-25.695) -23.597,-25.695 -23.597,-18.443 ccw(c-25.066,-18.443) -24.027,-17.404 -27.707,-13.724 cw(c-27.241,-13.258) -27.9,-13.258 v1(-27.9,-10.8)
NetC11_2: C11.2 R5.1 U3.12 | length 5.7
  Top Layer w0.254: U3.12@-13.33,-0.95 -10.838,-0.95 -10.07,-0.182 R5.1@-9.7,-0.182 C11.2@-9.7,1.585
NetC12_2: C12.2 R12.1 R14.2 U4.6 | length 26.9
  Top Layer w0.254: R12.1@-12.9,-20 -12.9,-20.21 -11.973,-21.137 -10.292,-21.137 R14.2@-9.365,-20.21 ; R14.2@-9.365,-20 R14.2@-9.365,-19.79 ; U4.6@0.63,-31.575 -1.286,-31.575 ccw(c-1.286,-31.673) -1.355,-31.604 -1.584,-31.833 cw(c-1.654,-31.764) -1.654,-31.862 -3.738,-31.862 -4.838,-30.762 -4.838,-29.068 -5.178,-28.728 cw(c-5.087,-28.637) -5.216,-28.637 -5.216,-20.961 ccw(c-5.45,-20.961) -5.284,-20.796 -5.9,-20.18 -6.882,-21.162 -8.432,-21.162 -8.682,-20.912 -8.682,-20.893 R14.2@-9.365,-20.21 ; R14.2@-9.365,-20.21 R14.2@-9.365,-19.79 ; R14.2@-9.365,-20.21 R14.2@-9.365,-19.79
NetC17_1: C17.1 R69.2 | length 4
  Top Layer w0.254: R69.2@24.656,17.225 24.656,18.056 26.038,19.438 26.399,19.438 C17.1@26.992,20.031